# Altium PCB Driver_PCB.PcbDoc
Units mm, origin at the board's own origin, x right, y up, seen from the top; angles counter-clockwise.
Board outline 100 x 100 mm, 4 copper layers (Top Layer, Jumper top, Jumper down, Bottom Layer), stack 0.603 mm thick; 80 components, 79 nets, 267 pads, 25 vias.
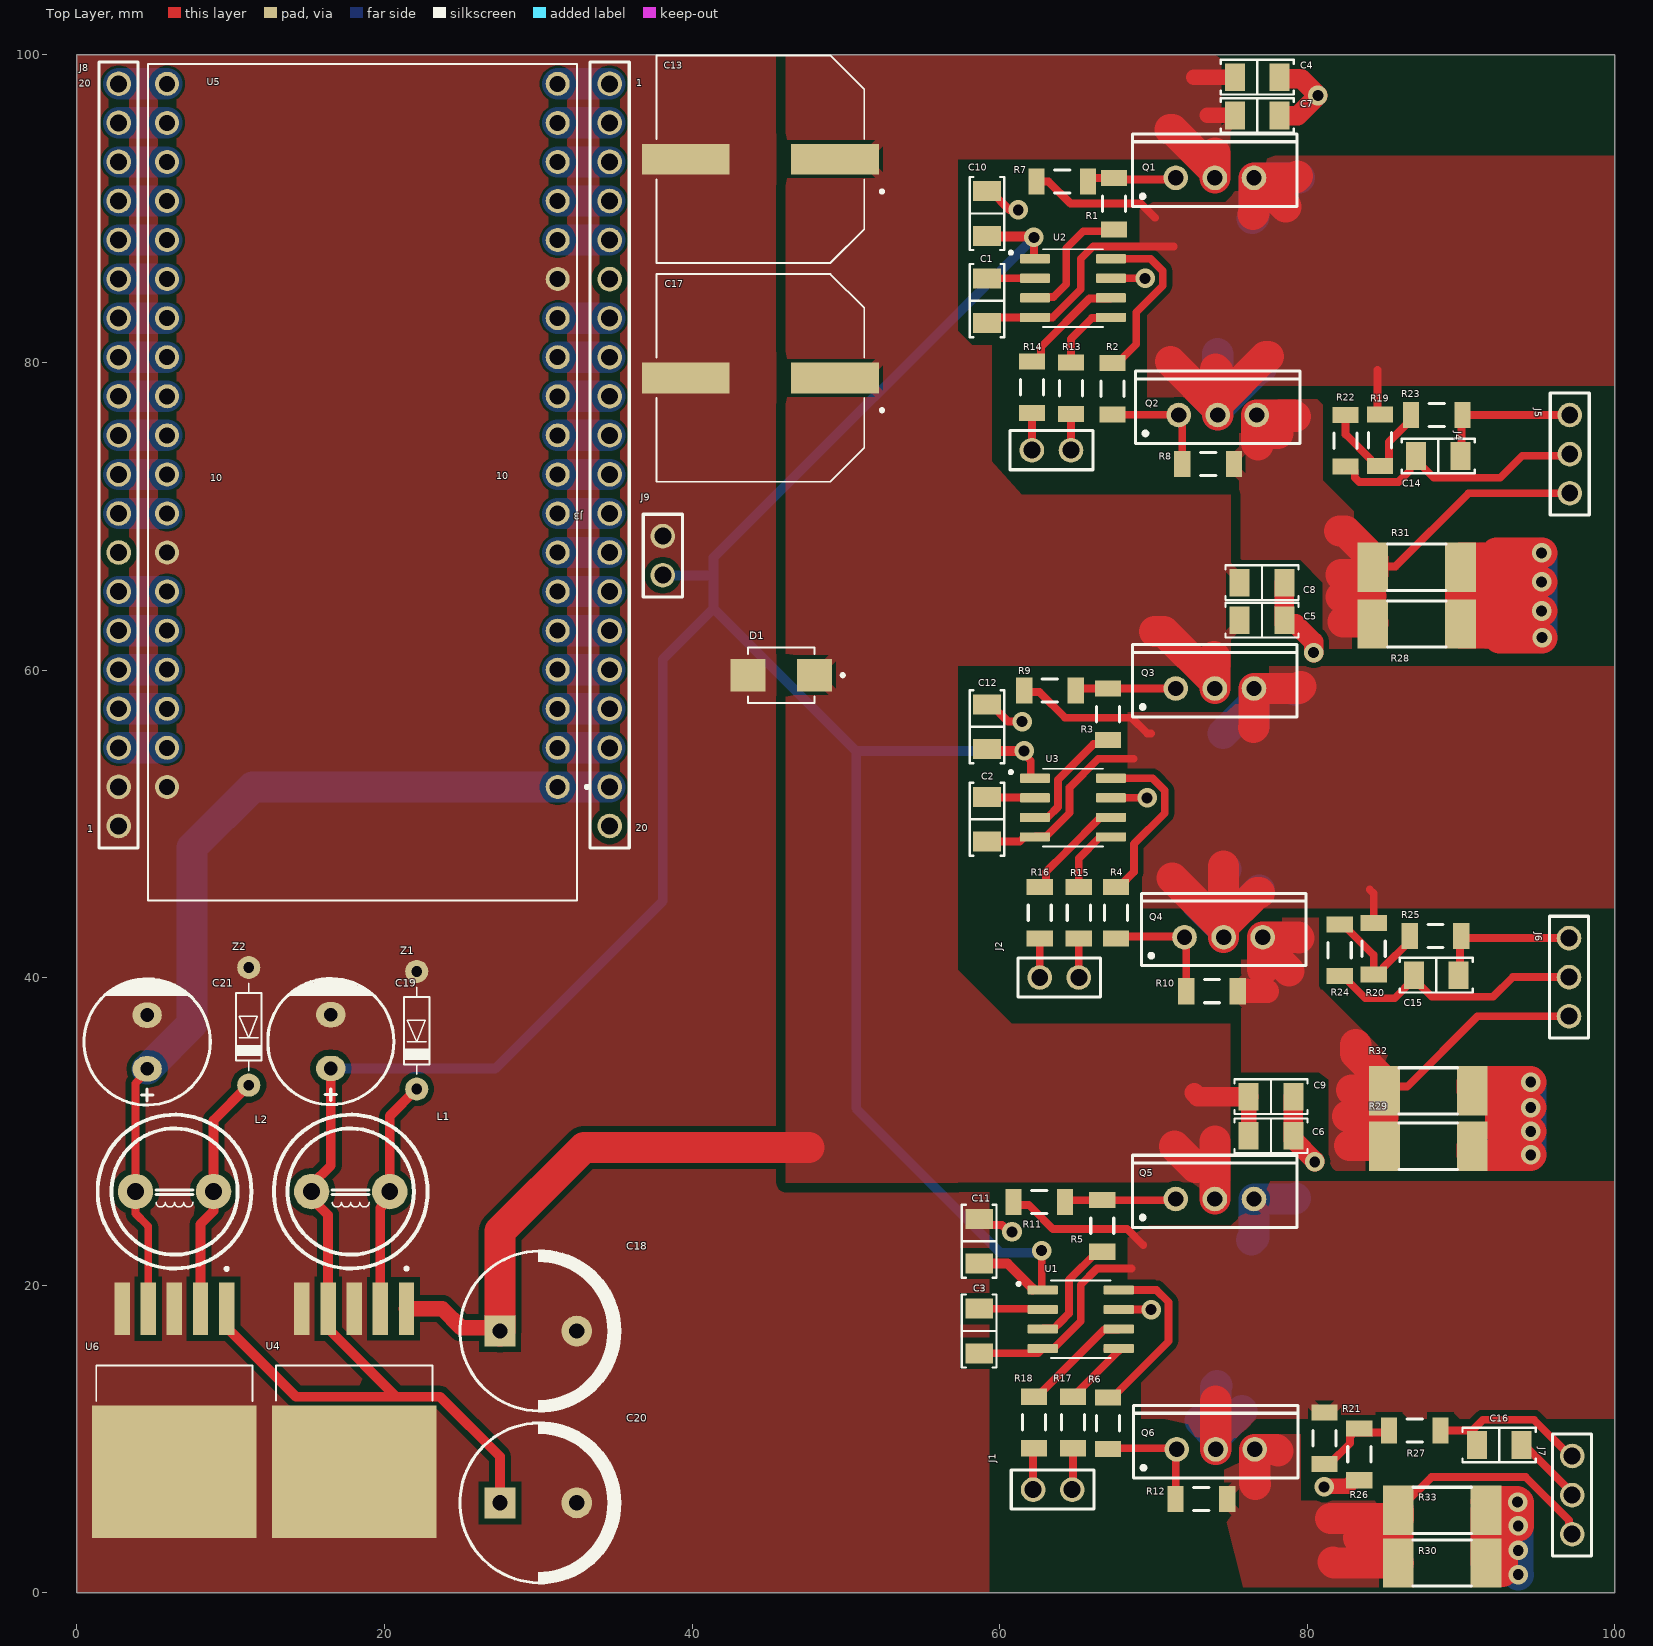
[diagram p0: Top Layer view]
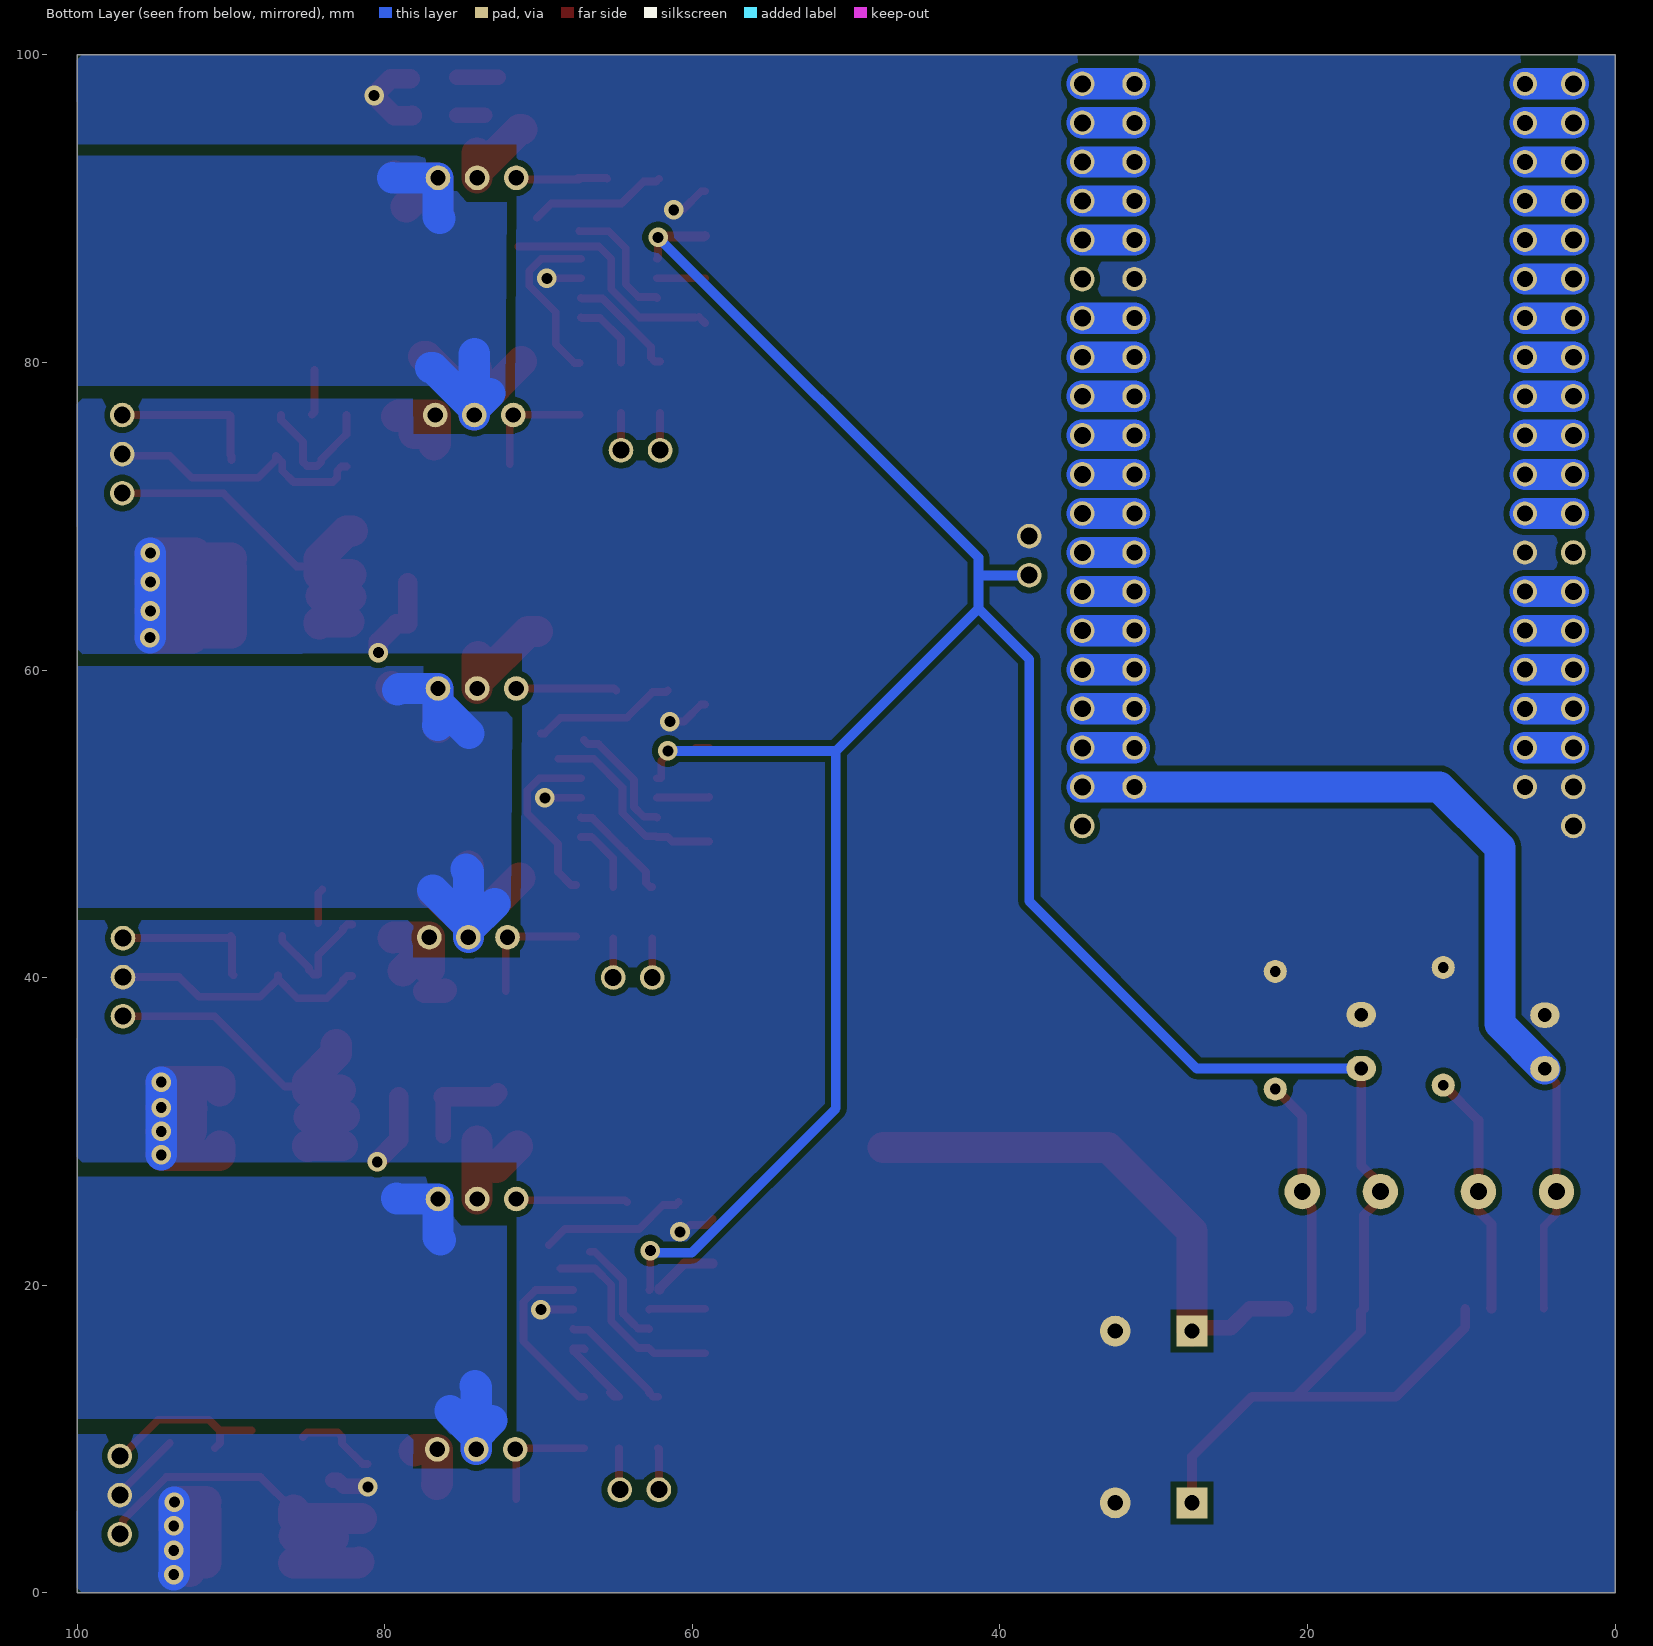
[diagram p1: Bottom Layer view, seen from below]
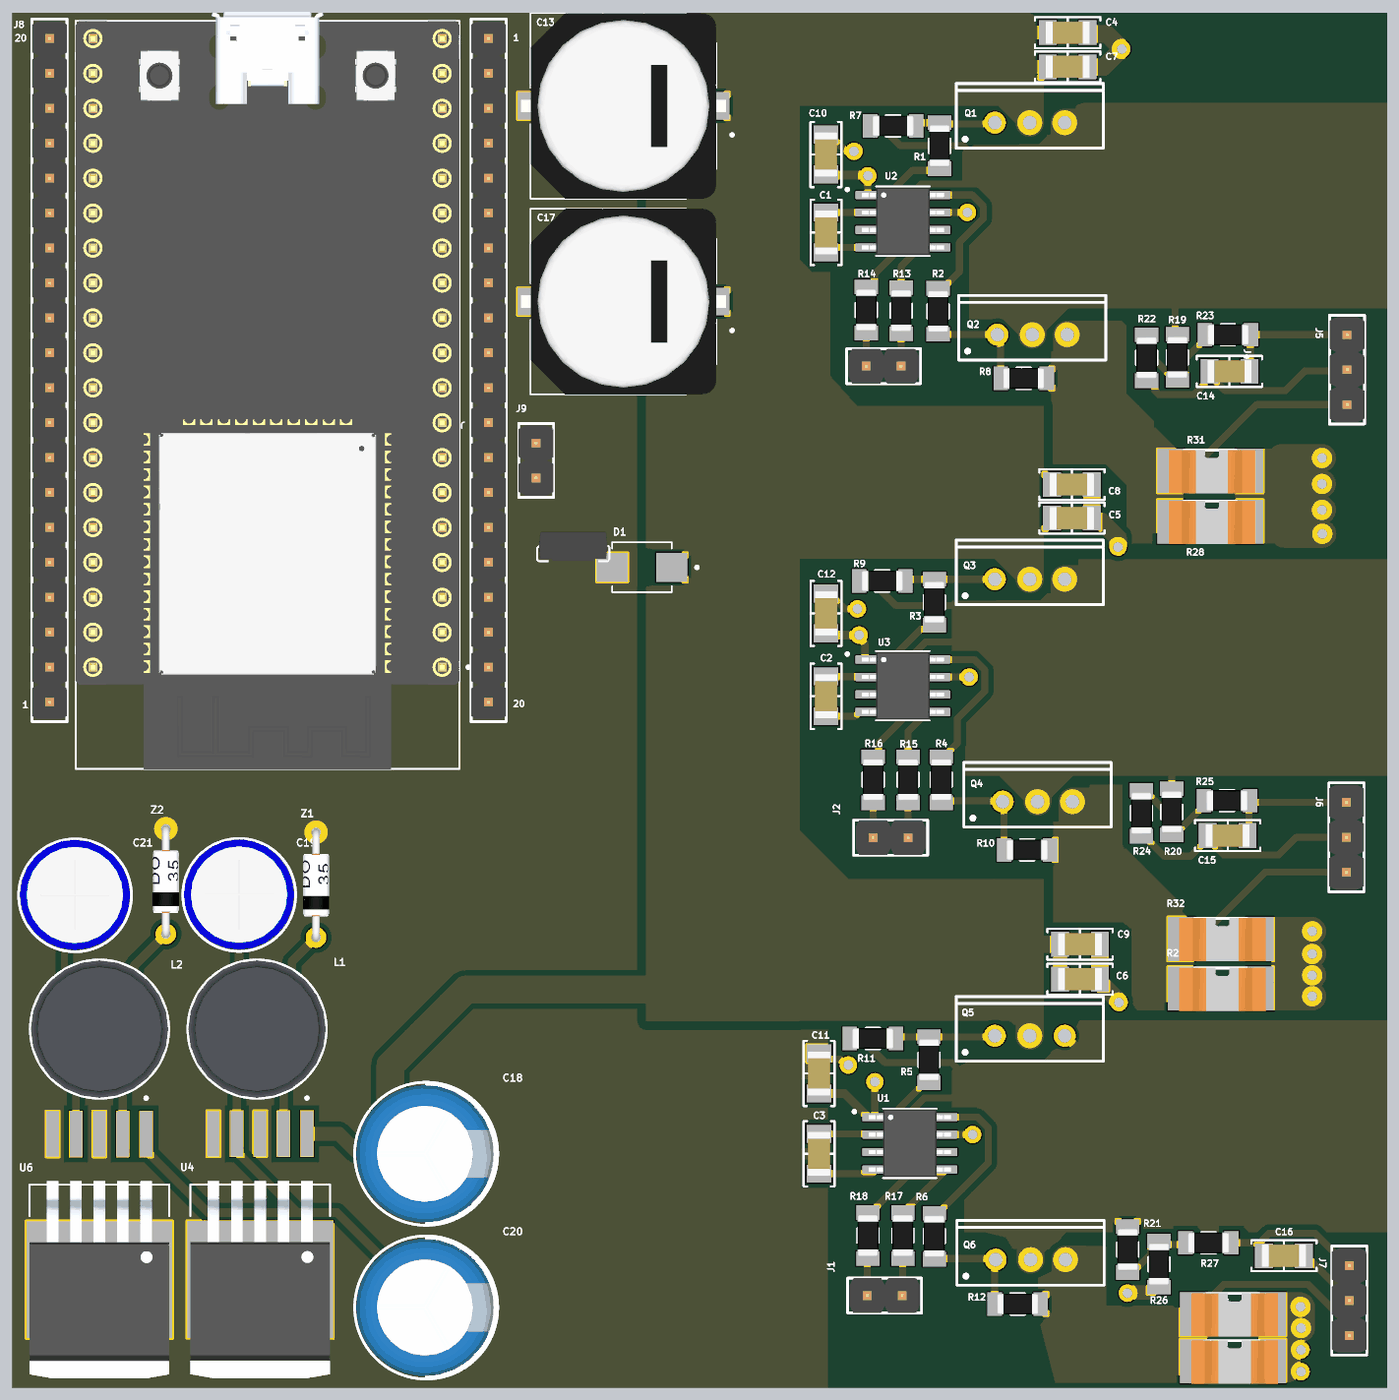
[diagram p2: 3D render of the assembled board from above, using the file's embedded part models]

## Layer stack, top to bottom
Top Solder: solder mask 0.0102, Solder Resist, Dk 3.5
Top Layer: signal copper 0.0356
Dielectric 2: prepreg 0.0711, PP-006, Dk 4.1
Jumper top: signal copper 0.035
Dielectric 1: dielectric 0.32, FR-4, Dk 4.8
Jumper down: signal copper 0.035
Dielectric 3: prepreg 0.0711, PP-006, Dk 4.1
Bottom Layer: signal copper 0.0356
Bottom Solder: solder mask 0.0102, Solder Resist, Dk 3.5

## Board outline
0,0 0,100 100,100 100,0

## Design rules (kind name [scope] priority, off if disabled: settings)
Clearance [All] p1: gap=0.254 ignorepadtopadclearanceinfootprint=FALSE except(0.381: Arc-Poly Track-Poly SMDPad-Poly THPad-Poly Via-Poly Fill-Poly Poly-Region Poly-Text Poly-Hole; 0.635: Poly-Poly)
Clearance "GND Clearance" [InNet('GND')] p2: gap=0.254 ignorepadtopadclearanceinfootprint=FALSE
PlaneClearance [All] p1: clearance=1.27
PlaneConnect [All] p1: planeconnectstyle=Relief reliefexpansion=0.254 reliefentries=4 reliefconductorwidth=0.254 reliefairgap=0.254
PolygonConnect "GND connect" [InNet('GND')] p1: connectstyle=Direct reliefconductorwidth=0.254 reliefentries=4 polygonreliefangle="90 Angle" airgapwidth=0.254
PolygonConnect [All] p2: connectstyle=Relief reliefconductorwidth=0.635 reliefentries=4 polygonreliefangle="45 Angle" airgapwidth=0.254
RoutingVias [All] p1: holewidth=0.711 width=1.27 viastyle="Through Hole" minholewidth=0.711 minwidth=1.27 maxholewidth=0.711 maxwidth=1.27
SolderMaskExpansion [All] p1: expansion=0.102 istentingtop=FALSE
SupplyNets "Schematic Supply Nets_4" [InNet('+3.3V')] p1: voltage=0.000
SupplyNets "Schematic Supply Nets_3" [InNet('+12V')] p2: voltage=0.000
SupplyNets "Schematic Supply Nets_2" [InNet('GND')] p3: voltage=0.000
SupplyNets "Schematic Supply Nets_1" [InNet('+30V')] p4: voltage=0.000
Width [All] p1: maxlimit=10.16 minlimit=0.508 preferedwidth=0.508 midlayer1_maxwidth=1.016 midlayer2_maxwidth=1.016 minimp=50.000000 maximp=50.000000 favimp=50.000000
28 further rules are at their usual default settings.

## Components (designator, comment, footprint, x,y, rotation, side; value= is the part's Value field where it differs from the comment)
C1 "0.1uF" "CAP 1206/3216" 59.182,84.021 r90 top
C2 "0.1uF" "CAP 1206/3216" 59.182,50.292 r90 top
C3 "0.1uF" "CAP 1206/3216" 58.674,17.018 r90 top
C4 "100nF" "CAP 1206/3216" 76.759,98.552 r0 top
C5 "100nF" "CAP 1206/3216" 77.064,63.246 r0 top
C6 "100nF" "CAP 1206/3216" 77.65,29.718 r0 top
C7 "1uF" "CAP 1206/3216" 76.759,96.063 r0 top
C8 "1uF" "CAP 1206/3216" 77.064,65.684 r0 top
C9 "1uF" "CAP 1206/3216" 77.65,32.258 r0 top
C10 "1uF" "CAP 1206/3216" 59.177,89.688 r90 top
C11 "1uF" "CAP 1206/3216" 58.674,22.86 r90 top
C12 "1uF" "CAP 1206/3216" 59.182,56.314 r90 top
C13 "EEVFK1J221Q" CAP_EEVFK1J221Q 44.45,93.218 r180 top
C14 "4.7nF" "CAP 1206/3216" 88.519,73.914 r180 top
C15 "4.7nF" "CAP 1206/3216" 88.39,40.157 r180 top
C16 "4.7nF" "CAP 1206/3216" 92.481,9.601 r0 top
C17 "EEVFK1J221Q" CAP_EEVFK1J221Q 44.45,78.994 r180 top
C18 "220u'F, 50'V" "Cap electrolitic radial 10x16-5" 30.012,17.018 r0 top
C19 "470u'F, 25'V" "Cap 03" 16.51,35.842 r270 top
C20 "220u'F, 50'V" "Cap electrolitic radial 10x16-5" 30.012,5.842 r0 top
C21 "470u'F, 25'V" "Cap 03" 4.572,35.814 r270 top
D1 "SMBJ36A" DIOM4336X265N 45.798,59.665 r180 top
J1 "2" HDR_THT_2M_2.54mm 63.449,6.706 r180 top
J2 "2" HDR_THT_2M_2.54mm 63.881,40.005 r180 top
J3 "20" HDR_THT_20M_2.54mm#1 34.646,73.99 r270 top
J4 "2" HDR_THT_2M_2.54mm 63.373,74.295 r180 top
J5 "3" HDR_THT_3M_2.54mm 97.075,74.041 r90 top
J6 "3" HDR_THT_3M_2.54mm 97.028,40.03 r90 top
J7 "3" HDR_THT_3M_2.54mm 97.231,6.35 r90 top
J8 "20" HDR_THT_20M_2.54mm#2 2.718,73.99 r90 top
J9 "2" HDR_THT_2M_2.54mm 38.1,67.437 r90 top
L1 "1.2u'H, 3'A" "Inductor 10x12 (200 mils)" 17.805,26.086 r180 top
L2 "1.2u'H, 3'A" "Inductor 10x12 (200 mils)" 6.35,26.086 r180 top
Q1 "IRFB4410Z" TO-220AB 74,92 r0 top
Q2 "IRFB4410Z" TO-220AB 74.184,76.584 r0 top
Q3 "IRFB4410Z" TO-220AB 74,58.8 r0 top
Q4 "IRFB4410Z" TO-220AB 74.565,42.627 r0 top
Q5 "IRFB4410Z" TO-220AB 74,25.6 r0 top
Q6 "IRFB4410Z" TO-220AB 74.058,9.321 r0 top
R1 "10R" "RES 1206 (3216X08L)" 67.437,89.027 r90 top
R2 "10R" "RES 1206 (3216X08L)" 67.335,79.578 r270 top
R3 "10R" "RES 1206 (3216X08L)" 67.056,55.828 r90 top
R4 "10R" "RES 1206 (3216X08L)" 67.564,45.518 r270 top
R5 "10R" "RES 1206 (3216X08L)" 66.675,22.554 r90 top
R6 "10R" "RES 1206 (3216X08L)" 67.056,12.319 r270 top
R7 "10k" "RES 1206 (3216X08L)" 62.766,91.769 r0 top
R8 "10k" "RES 1206 (3216X08L)" 74.855,73.406 r180 top
R9 "10k" "RES 1206 (3216X08L)" 61.976,58.674 r0 top
R10 "10k" "RES 1206 (3216X08L)" 75.109,39.116 r180 top
R11 "10k" "RES 1206 (3216X08L)" 61.289,25.4 r0 top
R12 "10k" "RES 1206 (3216X08L)" 74.422,6.096 r180 top
R13 "33R" "RES 1206 (3216X08L)" 64.643,79.629 r270 top
R14 "33R" "RES 1206 (3216X08L)" 62.103,79.681 r270 top
R15 "33R" "RES 1206 (3216X08L)" 65.151,45.518 r270 top
R16 "33R" "RES 1206 (3216X08L)" 62.611,45.518 r270 top
R17 "33R" "RES 1206 (3216X08L)" 64.77,12.371 r270 top
R18 "33R" "RES 1206 (3216X08L)" 62.23,12.371 r270 top
R19 "100k" "RES 1206 (3216X08L)" 84.729,76.233 r270 top
R20 "100k" "RES 1206 (3216X08L)" 84.328,43.18 r270 top
R21 "100k" "RES 1206 (3216X08L)" 81.128,11.354 r270 top
R22 "10k" "RES 1206 (3216X08L)" 82.499,73.608 r90 top
R23 "1k" "RES 1206 (3216X08L)" 87.122,76.581 r0 top
R24 "10k" "RES 1206 (3216X08L)" 82.118,40.488 r90 top
R25 "1k" "RES 1206 (3216X08L)" 87.046,42.697 r0 top
R26 "10k" "RES 1206 (3216X08L)" 83.388,7.696 r90 top
R27 "1k" "RES 1206 (3216X08L)" 85.7,10.541 r0 top
R28 "10mR 2512 2.5W" Shunt_2512 87.122,62.992 r180 top
R29 "10mR 2512 2.5W" Shunt_2512 87.884,29.032 r180 top
R30 "10mR 2512 2.5W" Shunt_2512 88.773,1.93 r180 top
R31 "10mR 2512 2.5W" Shunt_2512 87.122,66.681 r180 top
R32 "10mR 2512 2.5W" Shunt_2512 87.884,32.639 r180 top
R33 "10mR 2512 2.5W" Shunt_2512 88.773,5.359 r180 top
U1 "UCC27201ADR" SOIC127P599X175-8N 65.278,17.78 r0 top
U2 "UCC27201ADR" SOIC127P599X175-8N 64.77,84.836 r0 top
U3 "UCC27201ADR" SOIC127P599X175-8N 64.77,51.054 r0 top
U4 "LM2596SX-12/NOPB" VREG_LM2596SX-12/NOPB 18.034,7.874 r270 top
U5 "ESP32-DEVKITC-32D" MODULE_ESP32-DEVKITC-32D 18.567,72.16 r180 top
U6 "LM2596SX-3.3/NOPB" VREG_LM2596SX-3.3/NOPB 6.339,7.862 r270 top
Z1 "3.3'V, 0.5'W" "DO 35" 22.098,36.576 r90 top
Z2 "3.3'V, 0.5'W" "DO 35" 11.176,36.83 r90 top

## Footprints (in the part's own frame and the unit in brackets; to place one, negate y for a bottom-side part, rotate by r counter-clockwise, add the part's x,y. Pads: shape width x height; smd on the part's side, far side on the other; paste and mask are expansions set on the pad)
"Cap 03" [mil] "diameter: 8'mm"
  oval 65x75 hole 35: 1(68.9,0) 2(-68.9,0)
  silkscreen extent -161,-161 161,161, body extent -159,-159 157,158, height 473
"CAP 1206/3216" [mm] "Chip Capacitor, 2-Leads, Body 3.25x1.60mm, IPC Medium Density"
  rect 1.3x1.8 smd: 1(-1.45,0) 2(1.45,0)
  silkscreen extent -2.37,-1.12 2.37,1.12, body extent -1.6,-0.81 1.6,0.81, height 1.62
"Cap electrolitic radial 10x16-5" [mm] "Cap electrolitic radial 10x16-5-Design:Abbas Basereh"
  rect 2x2 hole 1: 1(-2.5,0)
  round 2 hole 1: 2(2.5,0)
  silkscreen extent -5.1,-5.2 5.3,5.2, body extent -5,-5 5,5, height 16
CAP_EEVFK1J221Q [mm]
  rect 5.7x2 smd: 1(-4.85,0) 2(4.85,0)
  silkscreen extent -8,-6.75 6.75,6.75, body extent -7.45,-6.75 7.45,6.75, height 13.5
DIOM4336X265N [mm]
  rect 2.28x2.12 smd paste+0 mask+0.102: A(2.165,0) C(-2.165,0)
  silkscreen extent -4.1,-1.81 2.16,1.81, body extent 2.3,-2.58 7.7,-0.38, height 2.25
"DO 35" [mm] "Diode"
  round 1.5 hole 0.7: 1(3.825,0) 2(-3.825,0)
  silkscreen extent -2.88,-0.85 2.8,0.85, body extent -4.1,-0.96 4.08,0.96, height 2.46
HDR_THT_2M_2.54mm [mm] "Pin Header, pitch 2.54 mm, THT, Vertical, single row, 2p"
  round 1.6 hole 1.1: 1(-1.27,0) 2(1.27,0)
  silkscreen extent -2.69,-1.27 2.69,1.27, body extent -2.54,-1.27 2.54,1.27, height 8.57
HDR_THT_3M_2.54mm [mm] "Pin Header, pitch 2.54 mm, THT, Vertical, single row, 3p"
  round 1.6 hole 1.1: 1(-2.54,0) 2(0,0) 3(2.54,0)
  silkscreen extent -3.96,-1.27 3.96,1.27, body extent -3.81,-1.27 3.81,1.27, height 8.57
HDR_THT_20M_2.54mm#1 [mm] "Pin Header, pitch 2.54 mm, THT, Vertical, single row, 20p"
  round 1.6 hole 1.1: 1(-24.13,0) 2(-21.59,0) 3(-19.05,0) 4(-16.51,0) 5(-13.97,0) 6(-11.43,0) 7(-8.89,0) 8(-6.35,0) 9(-3.81,0) 10(-1.27,0) 11(1.27,0) 12(3.81,0) 13(6.35,0) 14(8.89,0) 15(11.43,0) 16(13.97,0) 17(16.51,0) 18(19.05,0) 19(21.59,0) ""(24.13,0)
  silkscreen extent -25.55,-1.27 25.55,1.27, body extent -25.4,-1.27 25.4,1.27, height 8.57
HDR_THT_20M_2.54mm#2 [mm] "Pin Header, pitch 2.54 mm, THT, Vertical, single row, 20p"
  round 1.6 hole 1.1: 1(-24.13,0) 2(-21.59,0) 3(-19.05,0) 4(-16.51,0) 5(-13.97,0) 6(-11.43,0) 7(-8.89,0) 8(-6.35,0) 9(-3.81,0) 10(-1.27,0) 11(1.27,0) 12(3.81,0) 13(6.35,0) 14(8.89,0) 15(11.43,0) 16(13.97,0) 17(16.51,0) 18(19.05,0) 19(21.59,0) 20(24.13,0)
  silkscreen extent -25.55,-1.27 25.55,1.27, body extent -25.4,-1.27 25.4,1.27, height 8.57
"Inductor 10x12 (200 mils)" [mm] "POWER INDUCTOR 10x12 (200 mils) DESIGNER ABBAS BASEREH"
  round 2.3 hole 1.1: 1(-2.54,0) 2(2.54,0)
  silkscreen extent -5,-5 5,5, body extent -5,-5 5,5, height 12.13
MODULE_ESP32-DEVKITC-32D [mm]
  round 1.56 hole 1.04: J2-1(-12.7,19.76) J2-2(-12.7,17.22) J2-3(-12.7,14.68) J2-4(-12.7,12.14) J2-5(-12.7,9.6) J2-6(-12.7,7.06) J2-7(-12.7,4.52) J2-8(-12.7,1.98) J2-9(-12.7,-0.56) J2-10(-12.7,-3.1) J2-11(-12.7,-5.64) J2-12(-12.7,-8.18) J2-13(-12.7,-10.72) J2-14(-12.7,-13.26) J2-15(-12.7,-15.8) J2-16(-12.7,-18.34) J2-17(-12.7,-20.88) J2-18(-12.7,-23.42) J2-19(-12.7,-25.96) J3-1(12.7,19.76) J3-2(12.7,17.22) J3-3(12.7,14.68) J3-4(12.7,12.14) J3-5(12.7,9.6) J3-6(12.7,7.06) J3-7(12.7,4.52) J3-8(12.7,1.98) J3-9(12.7,-0.56) J3-10(12.7,-3.1) J3-11(12.7,-5.64) J3-12(12.7,-8.18) J3-13(12.7,-10.72) J3-14(12.7,-13.26) J3-15(12.7,-15.8) J3-16(12.7,-18.34) J3-17(12.7,-20.88) J3-18(12.7,-23.42) J3-19(12.7,-25.96)
  silkscreen extent -14.7,-27.25 13.95,27.15, body extent -13.97,-27.9 13.97,27.2, height 6.69
"RES 1206 (3216X08L)" [mm] "Chip Resistor, 2-Leads, Body 3.2x1.6mm, IPC High Density _ (0.125 W)"
  rect 1.05x1.7 smd: 1(-0.377,0) 2(2.973,0)
  silkscreen extent 0.8,-0.75 1.8,0.75, body extent -0.23,-0.76 2.82,0.76, height 0.6
Shunt_2512 [mm] "Chip Resistor, 2-Leads, Body 6.3x3.1mm, IPC High Density _ (0.500 W)"
  rect 2x3.2 smd: 1(-2.85,0) 2(2.85,0)
  silkscreen extent -1.9,-1.5 1.9,1.5, body extent -3.28,-1.52 3.02,1.63, height 1.12
SOIC127P599X175-8N [mm]
  rrect25% 1.97x0.6 smd paste+0 mask+0.102: 1(-2.47,1.905) 2(-2.47,0.635) 3(-2.47,-0.635) 4(-2.47,-1.905) 5(2.47,-1.905) 6(2.47,-0.635) 7(2.47,0.635) 8(2.47,1.905)
  silkscreen extent -4.14,-2.52 1.95,2.52, body extent -3,-2.45 3,2.45, height 1.75
TO-220AB [mm] "TO, Thru-Hole, Vertical, Heatsink Mounted; 3 In-Line Leads; Pitch 2.54 mm"
  round 1.6 hole 1: 1(-2.54,0) 2(0,0) 3(2.54,0)
  silkscreen extent -5.35,-1.85 5.35,2.85, body extent -5.4,-1.9 5.4,2.9, height 19.3
VREG_LM2596SX-3.3/NOPB [mm]
  rect 3.4x1 smd paste-0.05 mask+0.07: 1(-10.6,3.4) 2(-10.6,1.7) 3(-10.6,0) 4(-10.6,-1.7) 5(-10.6,-3.4)
  rect 8.6x10.7 smd paste-0.05 mask+0.07: 6(0,0)
  silkscreen extent -13.3,-5.08 -4.62,5.08, body extent -7.18,-5.08 7.18,5.08, height 4.65
VREG_LM2596SX-12/NOPB [mm]
  rect 3.4x1 smd paste-0.05 mask+0.07: 1(-10.6,3.4) 2(-10.6,1.7) 3(-10.6,0) 4(-10.6,-1.7) 5(-10.6,-3.4)
  rect 8.6x10.7 smd paste-0.05 mask+0.07: 6(0,0)
  silkscreen extent -13.3,-5.08 -4.62,5.08, body extent -7.18,-5.08 7.18,5.08, height 4.65

## Part data
C1 C2 C3 C4 C5 C6 C7 C8 C9 C10 C11 C12 C14 C15 C16: library part Cap_Multi_SMD, "Bipolar ceramic capacitor SMD", Package=Package?, Rating=50V, Type=Type?, Validation=Valid, Inflow=inflow?
C13: "220µF 63V Aluminum Electrolytic Capacitors Radial, Can - SMD 5000 Hrs @ 105Â°C", Package="RADIAL-2 Panasonic", Availability="In Stock", Check_prices=https://www.snapeda.com/parts/EEVFK1J221Q/Panasonic%20Electronic%20Components/view-part/47452/?ref=eda, MF="Panasonic Electronic", MP=EEVFK1J221Q, Price=None, Purchase-URL=https://pricing.snapeda.com/search/part/EEVFK1J221Q/?ref=eda, SnapEDA_Link=https://www.snapeda.com/parts/EEVFK1J221Q/Panasonic%20Electronic%20Components/view-part/47452/?ref=snap
C17: "220ÂµF 63V Aluminum Electrolytic Capacitors Radial, Can - SMD 5000 Hrs @ 105Â°C", Package="RADIAL-2 Panasonic", Availability="In Stock", Check_prices=https://www.snapeda.com/parts/EEVFK1J221Q/Panasonic%20Electronic%20Components/view-part/47452/?ref=eda, MF="Panasonic Electronic", MP=EEVFK1J221Q, Price=None, Purchase-URL=https://pricing.snapeda.com/search/part/EEVFK1J221Q/?ref=eda, SnapEDA_Link=https://www.snapeda.com/parts/EEVFK1J221Q/Panasonic%20Electronic%20Components/view-part/47452/?ref=snap
C18 C20: library part Cap_Elec_220u_50, "Electrolit Capacitor", Package=Package?, Rating=Rating?, Value?="470uF 50V", Type=Type?, Validation=NT
C19 C21: library part Cap_Elec_470u_25, "Electrolit Capacitor", Package=Package?, Rating=Rating?, Value?="220uF 50V", Type=Type?, Validation=NT
D1: "58.1V Clamp 10.4A Ipp Tvs Diode Surface Mount DO-214AA (SMBJ)", Package="DO-214AA Littelfuse", Check_prices=https://www.snapeda.com/parts/SMBJ36A/Littelfuse/view-part/?ref=eda, MF="Littelfuse Inc.", MP=SMBJ36A, SnapEDA_Link=https://www.snapeda.com/parts/SMBJ36A/Littelfuse/view-part/?ref=snap
J1 J2 J4 J9: library part Con_MPH_2x1_V_THT_2.54, "Header, single row, 2 pin", Package=Package?, Rating=Rating?, Type=Type?, Validation=NT, Inflow=7152
J3 J8: library part Con_MPH_20x1_V_THT_2.54, "Header, single row, 20 pin", Package=Package?, Rating=Rating?, Type=Type?, Validation=NT, Inflow=7152
J5 J6 J7: library part Con_MPH_3x1_V_THT_2.54, "Header, single row, 3 pin", Package=Package?, Rating=Rating?, Type=Type?, Validation=NT, Inflow=7152
L1 L2: library part Ind_1.2u_Bob_3, "Inductor", Package=Package?, Rating=Rating?, Type=Type?, Validation=NT, Inflow="68uH Ferrite Core"
Q1 Q2 Q3 Q4 Q5 Q6: library part NMOS-2, "N-Channel Power MOSFET", ComponentLink1Description="Manufacturer Link", ComponentLink1URL=http://www.irf.com/, DatasheetVersion=PD-9.814, LatestRevisionDate=17-Jul-2002, LatestRevisionNote="Re-released for DXP Platform.", Note="Pin 2 is electrically connected to pin 4.", PackageDescription="TO, Thru-Hole, Vertical, Heatsink Mounted; 3 In-Line Leads; Pitch 2.54 mm", PackageReference=TO-220AB, PackageVersion=Feb-1997, Published=8-Jun-2000, Publisher="Altium Limited"
R1 R2 R3 R4 R5 R6 R7 R8 R9 R10 R11 R12 R13 R14 R15 R16 R17 R18 R19 R20 R21 R22 R23 R24 R25 R26 R27: library part Res_SMD_1206, "Resistor", Package=1206, Rating=0.25W, Type=10%, Validation=Valid, Inflow=inflow?
R28 R29 R30 R31 R32 R33: library part Res_Shunt_SMD, "Resistor", Package=Package?, Rating=Precision, Type=Shunt, Validation=NT, Inflow=inflow?
U1 U2 U3: "3-A, 120-V half bridge gate driver with 8-V UVLO and negative voltage handling", Package="SOIC-8 Texas Instruments", Check_prices=https://www.snapeda.com/parts/UCC27201ADR/Texas+Instruments/view-part/?ref=eda, MF="Texas Instruments", MP=UCC27201ADR, SnapEDA_Link=https://www.snapeda.com/parts/UCC27201ADR/Texas+Instruments/view-part/?ref=snap
U4 U6: "SIMPLE SWITCHERÂ® 4.5V to 40V, 3A Low Component Count Step-Down Regulator", Package="TO-263-5 Texas Instruments", MF="Texas Instruments"
  U4: Check_prices=https://www.snapeda.com/parts/LM2596SX-12/NOPB/Texas+Instruments/view-part/?ref=eda, MP=LM2596SX-12/NOPB, SnapEDA_Link=https://www.snapeda.com/parts/LM2596SX-12/NOPB/Texas+Instruments/view-part/?ref=snap
  U6: Check_prices=https://www.snapeda.com/parts/LM2596SX-3.3/NOPB/Texas+Instruments/view-part/?ref=eda, MP=LM2596SX-3.3/NOPB, SnapEDA_Link=https://www.snapeda.com/parts/LM2596SX-3.3/NOPB/Texas+Instruments/view-part/?ref=snap
U5: "WiFi Development Tools (802.11) ESP32 General Development Kit, ESP32-WROOM-32D on the board", Package=None, Check_prices=https://www.snapeda.com/parts/ESP32-DEVKITC-32D/Espressif+Systems/view-part/?ref=eda, MF="Espressif Systems", MP=ESP32-DEVKITC-32D, SnapEDA_Link=https://www.snapeda.com/parts/ESP32-DEVKITC-32D/Espressif+Systems/view-part/?ref=snap
Z1 Z2: library part Semi_Diod_Zener_THT, "Zener Diode", Package=Package?, Rating=Rating?, Value?="SR540 40V 5A", Type=Type?, Validation=Valid

## Via types
v1: diameter 1.27, hole 0.711, Top Layer to Bottom Layer, 25 vias

## Nets (pads, with @x,y where several pads share a name; then routed paths per layer and width w, separated by ;. In a path a pad name is that pad's centre, name@x,y a point inside that pad or via, vN(x,y) a via of type N, cw(c..) or ccw(c..) an arc to the next point about the centre after c; other vN are vias at no path point)
+3.3V: C21.1 J3.19 L2.2 U5.J2-1 U6.4 | length 60.7
  Top Layer w0.508: C21.1 4.572,33.882 3.81,33.12 L2.2 3.81,24.661 4.572,23.899 4.572,23.876 4.639,23.809 U6.4 U6.4@4.606,18.496
  Bottom Layer w2.032: C21.1 7.493,36.985 7.493,48.463 11.43,52.4 U5.J2-1 J3.19
+12V: C10.1 C11.1 C12.1 C19.1 C20.1 J9.1 L1.2 U1.1 U2.1 U3.1 U4.4 U6.1 | length 211.7
  Top Layer w0.508: v1(61.595,54.737) 61.595,54.531 62.021,54.104 62.021,53.005 62.067,52.959 U3.1 ; v1(62.23,88.138) 62.23,86.787 62.276,86.741 U2.1 ; v1(62.738,22.25) 62.738,19.731 62.784,19.685 U1.1
  Top Layer w0.635: U6.1 9.739,17.262 14.256,12.746 20.754,12.746 ; C19.1 16.51,27.781 15.265,26.536 L1.2 15.265,25.635 16.334,24.567 U4.4 16.517,18.291 16.517,16.983 20.754,12.746 ; C20.1 27.512,8.854 23.621,12.746 20.754,12.746 ; C11.1 60.527,21.41 62.14,19.796 U1.1@62.14,19.703 ; C12.1@58.928,54.864 C12.1@59.178,54.864 ; C10.1 59.227,88.188 62.18,88.188 v1(62.23,88.138) ; C12.1 59.76,54.864 59.887,54.737 v1(61.595,54.737)
  Bottom Layer w0.635: C19.1 27.209,34.092 38.1,44.983 38.1,60.706 41.402,64.008 ; J9.1 38.125,66.142 41.402,66.142 ; v1(61.595,54.737) 50.673,54.737 ; v1(62.23,88.138) 41.402,67.31 41.402,66.142 ; v1(62.738,22.25) 62.592,22.105 60.067,22.105 50.673,31.498 50.673,54.737 ; 41.402,64.008 41.402,66.142 ; 41.402,64.008 50.673,54.737
+30V: C4.1 C5.1 C6.1 C7.1 C8.1 C9.1 C13.1 C17.1 C18.1 D1.C Q1.2 Q3.2 Q5.2 U4.1 | length 65.7
  Top Layer w1.016: U4.1 23.749,18.474 24.988,17.235 27.295,17.235 C18.1 ; 72.644,98.552 C4.1 ; 73.508,96.063 C7.1 ; C6.1 C9.1
  Top Layer w1.27: 72.644,32.512 72.898,32.258 C9.1
  Top Layer w2.032: C18.1 27.512,23.499 32.969,28.956 47.6,28.956 ; 70.079,62.509 70.678,62.509 74,59.187 Q3.2 74,60.823 73.939,60.884 ; 71.095,95.148 71.239,95.148 74,92.387 Q1.2 74,93.599 ; 71.374,29.032 72.736,27.67 72.786,27.67 ; Q5.2 74,29.353
GND: C4.2 C5.2 C6.2 C7.2 C8.2 C9.2 C10.2 C11.2 C12.2 C13.2 C14.2 C15.2 C16.2 C17.2 C18.2 C19.2 C20.2 C21.2 D1.A J5.2 J6.2 J7.2 J8.1 J8.2 J9.2 R22.1 R24.1 R26.1 R28.1 R29.1 R30.1 R31.1 R32.1 R33.1 U1.7 U2.7 U3.7 U4.3 U4.5 U4.6 U5.J2-14 U5.J3-1 U5.J3-7 U6.3 U6.5 U6.6 Z1.1 Z2.1 | length 141.7
  Top Layer w0.508: C11.2 59.07,23.914 60.157,23.914 60.601,23.47 v1(60.808,23.47) ; C10.2 59.427,91.138 60.649,89.916 v1(61.214,89.916) ; C12.2 59.432,57.764 60.546,56.65 61.46,56.65 v1(61.468,56.642) ; U3.7 v1(69.596,51.689) ; U2.7 v1(69.469,85.471) ; U1.7 v1(69.85,18.415) ; R24.1 82.443,40.111 82.714,39.84 82.714,39.727 83.783,38.659 85.691,38.659 C15.2@86.94,39.907 ; R22.1 82.824,73.231 83.095,72.96 83.095,72.524 83.393,72.227 85.943,72.227 86.673,72.957 86.673,73.518 C14.2 87.069,73.664 88.227,72.506 92.558,72.506 93.991,73.939 J5.2@97.053,73.939 ; C15.2 C15.2@86.94,39.907 ; C16.2@93.982,9.732 97.028,6.686 J7.2@97.028,6.426 ; J6.2 93.37,40.03 92.089,38.749 88.098,38.749 C15.2@86.94,39.907
  Top Layer w1.016: v1(81.102,6.883) 81.151,6.932 82.676,6.932 83.063,7.319 R26.1
  Top Layer w1.27: C7.2 78.209,96.052 78.224,96.037 79.375,96.037 v1(80.696,97.358) 79.604,98.45 C4.2@78.351,98.45 ; C5.2@78.514,63.011 78.529,62.996 79.248,62.996 80.416,61.828 v1(80.416,61.138) ; C5.2 C8.2 ; C9.2 C6.2 79.1,29.468 80.493,28.075 v1(80.493,28.016)
  Top Layer w2.032: R28.1@89.972,63.56 89.988,63.576 90.556,63.576 90.912,63.932 92.405,63.932 92.498,63.839 v1(95.25,63.839) ; R31.1@89.972,67.249 89.988,67.265 91.98,67.265 92.329,67.615 v1(95.25,67.615) ; R29.1 90.734,28.464 90.75,28.448 94.514,28.448 v1(94.539,28.473) ; R32.1 90.734,33.207 90.75,33.223 92.594,33.223 ; R30.1 R33.1 ; R33.1@91.639,5.927 93.649,5.927 93.726,5.85 v1(93.726,4.343) ; 92.543,31.47 94.462,31.47 v1(94.539,31.547) ; 92.682,5.927 92.682,1.399 92.685,1.397 ; v1(94.539,29.997) 94.488,30.048 92.594,30.048 92.594,33.223 ; v1(94.539,33.198) 94.514,33.223 92.594,33.223 ; v1(95.25,65.727) 92.388,65.727 92.354,65.761 90.893,65.761 90.556,66.097 89.988,66.097 89.972,66.113 R31.1 R28.1 89.972,62.424 89.988,62.408 92.202,62.408 92.507,62.103 v1(95.275,62.103)
  Bottom Layer w2.032: v1(93.688,5.888) 93.688,1.215 v1(93.726,1.177) ; v1(94.539,28.473) v1(94.539,33.198) ; v1(95.25,67.615) 95.25,62.128 v1(95.275,62.103)
  other v1: 93.726,2.76
NetC1_1: C1.1 Q1.3 Q2.2 R7.1 R19.1 U2.4 | length 61.9
  Top Layer w0.508: C1.1 C1.1@59.578,82.967 ; C1.1@59.842,82.931 U2.4 63.449,82.931 65.278,84.76 65.278,86.738 66.089,87.549 71.32,87.549 ; R7.1@62.182,91.948 62.361,91.769 63.171,91.769 64.609,90.331 69.181,90.331 70.104,89.408 ; 84.582,79.502 84.582,76.757 R19.1
  Top Layer w2.032: 71.12,80.061 Q2.2@74.184,76.997 ; 74.041,79.553 74.184,79.41 Q2.2@74.184,77.277 ; Q2.2 Q2.2@74.184,76.997 ; 76.479,89.637 76.54,89.697 Q1.3 Q1.3@76.732,92 ; 77.47,80.391 77.298,80.391 Q2.2@74.184,77.277 ; 78.613,90.119 Q1.3@76.732,92 ; 79.375,92.126 79.249,92 Q1.3@76.732,92 ; Q2.2@74.184,76.997 Q2.2@74.184,77.277
  Bottom Layer w2.032: 73.177,77.978 Q2.2@74.184,76.972 ; 74.168,80.569 74.184,80.553 Q2.2@74.184,76.972 ; Q2.2 Q2.2@74.184,76.972 ; 76.429,89.357 76.54,89.469 Q1.3 79.478,92 79.502,92.024 ; 77.013,79.654 76.866,79.654 Q2.2@74.184,76.972
NetC1_2: C1.2 U2.2 | length 3.1
  Top Layer w0.508: C1.2 U2.2
NetC2_1: C2.1 Q3.3 Q4.2 R9.1 R20.1 U3.4 | length 64.3
  Top Layer w0.508: C2.1@58.928,48.842 61.308,48.842 61.615,49.149 U3.4 62.346,49.195 63.035,49.195 64.555,50.715 64.555,52.363 66.421,54.229 68.707,54.229 ; R9.1 61.703,58.57 62.588,58.57 64.262,56.896 68.58,56.896 69.596,55.88 69.85,55.88 ; 84.074,45.72 84.328,45.466 R20.1
  Top Layer w2.032: 71.222,46.482 74.565,43.139 Q4.2 ; 74.565,47.254 Q4.2 ; 76.505,56.261 76.54,56.296 Q3.3 79.45,58.8 79.578,58.928 ; 76.886,45.517 76.762,45.517 74.565,43.319 Q4.2
  Bottom Layer w2.032: 72.847,44.806 74.565,43.088 Q4.2 ; 74.524,55.88 76.54,57.896 Q3.3 ; 74.727,47.041 74.565,46.879 Q4.2 ; 76.556,56.413 76.54,56.429 Q3.3 ; 76.886,45.695 74.565,43.373 Q4.2 ; 79.172,58.699 79.071,58.8 Q3.3
NetC2_2: C2.2 U3.2 | length 3.4
  Top Layer w0.508: C2.2@58.928,51.742 58.954,51.715 62.274,51.715 U3.2
NetC3_1: C3.1 Q5.3 Q6.2 R11.1 R21.1 U1.4 | length 41
  Top Layer w0.508: C3.1@59.182,15.568 62.501,15.568 62.854,15.921 63.543,15.921 65.278,17.656 65.278,20.027 66.333,21.082 68.58,21.082 ; R11.1 61.091,25.221 61.901,25.221 63.466,23.656 68.292,23.656 69.342,22.606
  Top Layer w2.032: 74.041,12.446 74.058,12.429 Q6.2
  Bottom Layer w2.032: 73.025,11.201 74.058,10.168 Q6.2 ; 74.143,13.462 74.058,13.377 Q6.2 ; 75.768,11.836 74.058,10.126 Q6.2 ; 76.378,22.936 76.54,23.098 Q5.3 79.194,25.6 79.248,25.654
NetC3_2: C3.2 U1.2 | length 3.6
  Top Layer w0.508: C3.2@59.182,18.468 62.755,18.468 U1.2
NetC14_1: C14.1 J5.3 R23.2 | length 9.9
  Top Layer w0.508: C14.1@89.969,73.664 C14.1 90.032,73.977 90.032,76.518 R23.2 J5.3
NetC15_1: C15.1 J6.3 R25.2 | length 9.7
  Top Layer w0.508: C15.1 89.929,40.247 89.929,42.608 R25.2 90.146,42.57 J6.3
NetC16_1: C16.1 J7.3 R27.2 | length 10.9
  Top Layer w0.508: R27.2 90.532,10.541 90.723,10.541 ; C16.1@91.057,9.394 90.723,9.728 90.723,10.541 ; J7.3@97.028,8.966 94.742,11.252 91.434,11.252 90.723,10.541
NetJ1_1: J1.1 R17.2 | length 2.8
  Top Layer w0.508: J1.1@64.77,6.604 R17.2
NetJ1_2: J1.2 R18.2 | length 2.7
  Top Layer w0.508: J1.2 62.179,9.347 R18.2
NetJ2_1: J2.1 R15.2 | length 2.5
  Top Layer w0.508: J2.1 R15.2
NetJ2_2: J2.2 R16.2 | length 2.5
  Top Layer w0.508: J2.2 R16.2
NetJ3_1: J3.1 U5.J2-19 | length 3.4
  Bottom Layer w2.032: U5.J2-19 J3.1
NetJ3_2: J3.2 U5.J2-18 | length 3.4
  Bottom Layer w2.032: U5.J2-18 J3.2
NetJ3_3: J3.3 U5.J2-17 | length 3.4
  Bottom Layer w2.032: U5.J2-17 J3.3
NetJ3_4: J3.4 U5.J2-16 | length 3.4
  Bottom Layer w2.032: U5.J2-16 J3.4
NetJ3_5: J3.5 U5.J2-15 | length 3.4
  Bottom Layer w2.032: U5.J2-15 J3.5
NetJ3_7: J3.7 U5.J2-13 | length 3.4
  Bottom Layer w2.032: U5.J2-13 J3.7
NetJ3_8: J3.8 U5.J2-12 | length 3.4
  Bottom Layer w2.032: U5.J2-12 J3.8
NetJ3_9: J3.9 U5.J2-11 | length 3.4
  Bottom Layer w2.032: U5.J2-11 J3.9
NetJ3_10: J3.10 U5.J2-10 | length 3.4
  Bottom Layer w2.032: U5.J2-10 J3.10
NetJ3_11: J3.11 U5.J2-9 | length 3.4
  Bottom Layer w2.032: U5.J2-9 J3.11
NetJ3_12: J3.12 U5.J2-8 | length 3.4
  Bottom Layer w2.032: U5.J2-8 J3.12
NetJ3_13: J3.13 U5.J2-7 | length 3.4
  Bottom Layer w2.032: U5.J2-7 J3.13
NetJ3_14: J3.14 U5.J2-6 | length 3.4
  Bottom Layer w2.032: U5.J2-6 J3.14
NetJ3_15: J3.15 U5.J2-5 | length 3.4
  Bottom Layer w2.032: U5.J2-5 J3.15
NetJ3_16: J3.16 U5.J2-4 | length 3.4
  Bottom Layer w2.032: U5.J2-4 J3.16
NetJ3_17: J3.17 U5.J2-3 | length 3.4
  Bottom Layer w2.032: U5.J2-3 J3.17
NetJ3_18: J3.18 U5.J2-2 | length 3.4
  Bottom Layer w2.032: U5.J2-2 J3.18
NetJ4_1: J4.1 R13.2 | length 2.4
  Top Layer w0.508: J4.1 R13.2@64.643,76.708
NetJ4_2: J4.2 R14.2 | length 2.4
  Top Layer w0.508: J4.2 R14.2
NetJ5_1: J5.1 Q2.3 R8.1 R28.2 R31.2 | length 31.3
  Top Layer w0.508: R31.2 84.328,66.737 85.736,66.737 90.5,71.501 J5.1
  Top Layer w2.032: 76.81,74.651 76.724,74.737 Q2.3 ; 78.102,75.387 77.92,75.387 Q2.3 ; 79.223,76.479 79.118,76.584 Q2.3 ; 82.118,69.037 82.484,69.037 84.272,67.249 R31.2 84.272,66.208 84.256,66.192 82.194,66.192 ; 82.194,64.745 84.074,64.745 84.15,64.821 ; 82.347,63.144 83.804,63.144 83.82,63.128 84.272,63.128 R28.2
NetJ6_1: J6.1 Q4.3 R10.1 R29.2 R32.2 | length 33.9
  Top Layer w0.508: 77.419,39.116 77.445,39.141 ; R32.2 85.304,32.909 86.498,32.909 91.08,37.49 J6.1
  Top Layer w1.524: 76.073,39.167 76.124,39.116 77.419,39.116
  Top Layer w2.032: 77.105,40.548 Q4.3 ; 78.816,40.437 77.105,42.148 Q4.3 ; 79.477,42.57 79.42,42.627 Q4.3 ; 82.626,30.988 84.836,30.988 84.912,30.912 ; 82.753,29.083 85.018,29.083 85.034,29.067 R29.2 ; 82.88,32.69 R32.2@85.018,32.69 ; 83.16,35.636 83.16,35.081 85.034,33.207 R32.2 85.034,32.674 R32.2@85.018,32.69 ; R32.2@85.018,33.223 R32.2@85.018,32.69
NetJ7_1: J7.1 Q6.3 R12.1 R30.2 R33.2 | length 29.8
  Top Layer w0.508: R33.2 88.082,7.518 94.213,7.518 97.022,4.709 97.022,4.019 J7.1
  Top Layer w2.032: 76.632,7.061 76.598,7.095 Q6.3 78.004,9.321 78.105,9.22 ; 81.534,4.826 85.907,4.826 85.923,4.842 R33.2 ; 81.686,2.007 81.763,1.93 R30.2 ; 83.337,3.581 85.801,3.581 85.903,3.683
NetJ8_3: J8.3 U5.J3-2 | length 3.1
  Bottom Layer w2.032: J8.3 U5.J3-2
NetJ8_4: J8.4 U5.J3-3 | length 3.1
  Bottom Layer w2.032: J8.4 U5.J3-3
NetJ8_5: J8.5 U5.J3-4 | length 3.1
  Bottom Layer w2.032: J8.5 U5.J3-4
NetJ8_6: J8.6 U5.J3-5 | length 3.1
  Bottom Layer w2.032: J8.6 U5.J3-5
NetJ8_7: J8.7 U5.J3-6 | length 3.1
  Bottom Layer w2.032: J8.7 U5.J3-6
NetJ8_9: J8.9 U5.J3-8 | length 3.1
  Bottom Layer w2.032: J8.9 U5.J3-8
NetJ8_10: J8.10 U5.J3-9 | length 3.1
  Bottom Layer w2.032: J8.10 U5.J3-9
NetJ8_11: J8.11 U5.J3-10 | length 3.1
  Bottom Layer w2.032: J8.11 U5.J3-10
NetJ8_12: J8.12 U5.J3-11 | length 3.1
  Bottom Layer w2.032: J8.12 U5.J3-11
NetJ8_13: J8.13 U5.J3-12 | length 3.1
  Bottom Layer w2.032: J8.13 U5.J3-12
NetJ8_14: J8.14 U5.J3-13 | length 3.1
  Bottom Layer w2.032: J8.14 U5.J3-13
NetJ8_15: J8.15 U5.J3-14 | length 3.1
  Bottom Layer w2.032: J8.15 U5.J3-14
NetJ8_16: J8.16 U5.J3-15 | length 3.1
  Bottom Layer w2.032: J8.16 U5.J3-15
NetJ8_17: J8.17 U5.J3-16 | length 3.1
  Bottom Layer w2.032: J8.17 U5.J3-16
NetJ8_18: J8.18 U5.J3-17 | length 3.1
  Bottom Layer w2.032: J8.18 U5.J3-17
NetJ8_19: J8.19 U5.J3-18 | length 3.1
  Bottom Layer w2.032: J8.19 U5.J3-18
NetJ8_20: J8.20 U5.J3-19 | length 3.1
  Bottom Layer w2.032: J8.20 U5.J3-19
NetL1_1: L1.1 U4.2 Z1.2 | length 15.3
  Top Layer w0.635: U4.2@19.773,18.513 U4.2 19.734,25.024 20.345,25.635 L1.1 20.345,30.998 Z1.2
NetL2_1: L2.1 U6.2 Z2.2 | length 15.9
  Top Layer w0.635: U6.2@8.084,18.507 U6.2 8.039,23.965 8.89,24.816 8.89,25.146 8.89,30.719 Z2.2
NetQ1_1: Q1.1 R1.2 R7.2 | length 6.1
  Top Layer w0.508: R7.2@65.532,91.948 65.584,92 R1.2 ; R1.2@67.36,91.896 71.356,91.896 Q1.1
NetQ2_1: Q2.1 R2.2 R8.2 | length 7.6
  Top Layer w0.508: R2.2 71.623,76.605 Q2.1 71.882,76.346 R8.2
NetQ3_1: Q3.1 R3.2 R9.2 | length 6.6
  Top Layer w0.508: R9.2 65.076,58.801 R3.2 71.459,58.801 Q3.1
NetQ4_1: Q4.1 R4.2 R10.2 | length 8
  Top Layer w0.508: R4.2@67.564,42.672 71.979,42.672 Q4.1 72.136,42.515 R10.2
NetQ5_1: Q5.1 R5.2 R11.2 | length 7.3
  Top Layer w0.508: R11.2 64.389,25.527 R5.2 71.387,25.527 Q5.1
NetQ6_1: Q6.1 R6.2 R12.2 | length 7.7
  Top Layer w0.508: R6.2@67.056,9.398 71.441,9.398 Q6.1 71.449,9.252 R12.2
NetR1_1: R1.1 U2.3 | length 8.2
  Top Layer w0.508: U2.3 62.346,84.247 63.495,84.247 64.338,85.09 64.338,87.427 65.44,88.529 67.343,88.529 R1.1@67.36,88.546
NetR2_1: R2.1 U2.8 | length 11.2
  Top Layer w0.508: U2.8 69.815,86.741 70.612,85.944 70.612,84.998 68.885,83.27 68.885,81.18 67.66,79.955 R2.1
NetR3_1: R3.1 U3.3 | length 7.9
  Top Layer w0.508: U3.3 62.346,50.465 63.165,50.465 63.793,51.093 63.793,52.871 66.102,55.18 66.785,55.18 R3.1
NetR4_1: R4.1 U3.8 | length 11.5
  Top Layer w0.508: U3.8 69.942,52.959 70.739,52.162 70.739,50.689 68.733,48.683 68.733,46.866 67.889,46.022 R4.1@67.564,46.022
NetR5_1: R5.1 U1.3 | length 7.2
  Top Layer w0.508: U1.3 62.854,17.191 63.543,17.191 63.959,17.607 64.516,18.164 64.516,20.343 66.35,22.177 R5.1
NetR6_1: R6.1 U1.8 | length 11.5
  Top Layer w0.508: R6.1@67.056,12.748 67.381,12.748 70.993,16.36 70.993,18.888 70.196,19.685 U1.8
NetR13_1: R13.1 U2.5 | length 4.7
  Top Layer w0.508: R13.1 64.643,81.534 65.994,82.885 67.194,82.885 U2.5
NetR14_1: R14.1 U2.6 | length 7.3
  Top Layer w0.508: R14.1 62.428,80.058 62.699,80.329 62.699,81.012 65.842,84.155 67.194,84.155 U2.6
NetR15_1: R15.1 U3.5 | length 4.5
  Top Layer w0.508: R15.1 65.151,47.745 66.555,49.149 U3.5
NetR16_1: R16.1 U3.6 | length 6.9
  Top Layer w0.508: R16.1 62.745,45.895 63.016,46.166 63.016,46.884 64.389,48.257 66.505,50.373 67.194,50.373 U3.6
NetR17_1: R17.1 U1.5 | length 5.8
  Top Layer w0.508: R17.1@65.366,13.019 65.095,12.748 R17.1 67.748,15.726 U1.5 67.063,15.875 U1.5@67.017,15.829
NetR18_1: R18.1 U1.6 | length 7.4
  Top Layer w0.508: R18.1 62.555,12.748 62.826,13.019 62.826,13.136 66.789,17.099 67.702,17.099 U1.6
NetR19_2: R19.2 R22.2 R23.1 | length 8.8
  Top Layer w0.508: R22.2 82.499,75.324 84.133,73.69 84.133,73.531 84.404,73.26 R19.2 85.054,73.26 85.325,73.531 85.325,74.836 86.745,76.256 R23.1
NetR20_2: R20.2 R24.2 R25.1 | length 8
  Top Layer w0.508: R24.2 82.443,43.461 82.714,43.19 82.714,43.077 84.328,41.464 R20.2 84.653,40.207 84.924,40.478 84.924,40.628 86.669,42.372 R25.1
NetR21_2: R21.2 R26.2 R27.1 | length 5.4
  Top Layer w0.508: R21.2 81.453,8.381 82.792,9.72 82.792,10.143 83.063,10.414 83.388,10.414 85.05,10.414 85.321,10.143 R27.1@85.321,10.135
pads on no net: J3. J3.6 J8.8

## Polygon pours and split planes (outlines as drawn)
GND on Top Layer "GND_L01_P017" (solid, pour order 17): 91.235,68.275 94.158,68.275 94.158,61.392 91.189,61.392
NetC3_1 on Top Layer "NETC3_1_L01_P025" (solid, pour order 25): 75.514,24.333 75.514,26.746 100,26.746 100,11.324 76.675,11.318 74.812,9.271 73.26,9.28 72.259,10.941 70.663,11.324 69.215,11.324 69.215,15.067 71.247,17.09 71.247,19.274 70.123,20.398 68.326,20.398 68.326,23.083 69.697,23.85 75.065,23.884
GND on Top Layer "GND_L01_P023" (solid, remove dead copper, pour order 23): 0,100 45.466,100 45.466,26.675 59.336,26.595 59.336,12.446 59.336,0 0,0
NetJ5_1 on Top Layer "NETJ5_1_L01_P016" (solid, pour order 16): 75.571,75.387 78.102,75.387 78.102,77.596 81.026,77.598 81.026,72.339 83.041,70.325 82.908,61.392 81.026,61.392 81.026,65.684 79.544,67.167 75.571,67.167
NetJ7_1 on Top Layer "NETJ7_1_L01_P022" (solid, pour order 22): 75.705,8.509 77.699,8.509 77.699,10.312 79.582,10.291 79.582,5.994 84.379,5.994 84.938,6.979 84.938,0.356 75.848,0.356 74.6,5.232 74.6,5.309 74.6,8.001
NetC1_1 on Top Layer "NETC1_1_L01_P005" (solid, pour order 5): 75.095,90.843 75.387,91.262 76.035,92.875 77.038,93.167 77.902,93.447 100,93.447 100,78.486 76.835,78.486 75.184,77.292 73.178,77.289 72.466,77.724 69.593,77.724 69.593,83.309 71.126,84.836 71.126,86.341 70.06,87.359 69.101,87.363 69.101,89.916 69.971,90.403 74.685,90.433
+30V on Top Layer "+30V_L01_P004" (solid, pour order 4): 46.101,100 57.277,100 57.277,82.067 58.217,81.128 59.487,81.128 59.487,71.363 57.277,71.363 57.277,26.67 46.101,26.67
NetJ6_1 on Top Layer "NETJ6_1_L01_P018" (solid, pour order 18): 75.717,41.17 78.365,41.17 78.365,44.137 80.747,44.147 80.747,39.446 85.928,34.265 85.928,27.432 81.407,27.432 81.407,33.35 80.747,33.86 75.717,33.86
NetC2_1 on Top Layer "NETC2_1_L01_P008" (solid, pour order 8): 75.311,57.785 77.521,57.785 77.521,60.247 100,60.247 100,44.524 76.962,44.524 75.381,42.635 73.762,42.621 72.542,44.524 69.291,44.524 69.291,48.343 71.298,50.341 71.298,52.424 70.123,53.598 68.326,53.598 68.326,57.241 70.059,57.252 74.809,57.283
+30V on Top Layer "+30V_L01_P010" (solid, pour order 10): 55.614,100 75.006,100 75.006,93.198 73,92.812 72.531,93.218 56.007,93.218 55.88,93.091
+30V on Top Layer "+30V_L01_P011" (solid, pour order 11): 56.067,77.385 61.448,71.399 75.032,71.399 75.032,60.198 73.269,58.827 72.224,60.273 56.048,60.273 55.921,60.146
+30V on Top Layer "+30V_L01_P012" (solid, pour order 12): 56.642,41.148 60.782,37.008 75.006,37.008 75.006,25.6 74,25.6 72.492,26.691 56.642,26.691
GND on Bottom Layer "GND_L04_P015" (solid, pour order 15): 0.025,100 100.025,100 100,94.185 71.418,94.174 71.526,75.334 78.154,75.334 78.183,77.635 100.025,77.635 100,61.032 71.053,61.088 71.193,41.301 78.183,41.282 78.154,43.744 100,43.744 100.025,27.982 71.425,27.982 71.425,8.054 78.186,8.05 78.154,10.316 100,10.316 100.025,0 0.025,0
NetC3_1 on Bottom Layer "NETC3_1_L04_P026" (solid, pour order 26): 75.502,24.338 75.502,27.051 79.223,27.051 99.988,27.051 99.988,11.328 76.662,11.323 75.737,10.306 72.622,10.324 72.247,10.945 72.06,10.99 72.06,17.917 72.06,23.869 75.053,23.889
NetC1_1 on Bottom Layer "NETC1_1_L04_P028" (solid, pour order 28): 75.07,90.843 75.362,91.262 76.01,92.875 77.013,93.167 77.876,93.447 99.975,93.447 99.975,78.486 76.81,78.486 75.159,77.292 73.152,77.289 72.441,77.724 69.567,77.724 69.567,83.309 71.101,84.836 71.101,86.341 70.034,87.359 69.075,87.363 69.075,89.916 69.946,90.403 74.66,90.433
NetC2_1 on Bottom Layer "NETC2_1_L04_P027" (solid, pour order 27): 75.288,57.792 77.498,57.792 77.498,60.254 99.977,60.254 99.977,44.531 76.939,44.531 75.359,42.642 73.739,42.628 72.52,44.531 69.269,44.531 69.269,48.35 71.275,50.348 71.275,52.431 70.1,53.605 68.303,53.605 68.303,57.248 70.037,57.259 74.786,57.29

## Text inside footprints (layer, text, board x,y; h text height)
J3: Top Overlay "10" at 27.28,72.415 h0.46; Top Overlay "1" at 36.373,97.968 h0.46
J8: Top Overlay "10" at 8.683,72.262 h0.46; Top Overlay "1" at 0.686,49.454 h0.46